# Altium PCB 示波器AD板最终实物版图.PcbDoc (part 1 of 2)
Units mil, origin at the board's own origin, x right, y up, seen from the top; angles counter-clockwise.
Board outline 10285 x 5540 mil, 2 copper layers (Top Layer, Bottom Layer); 84 components, 55 nets, 271 pads, 0 vias.
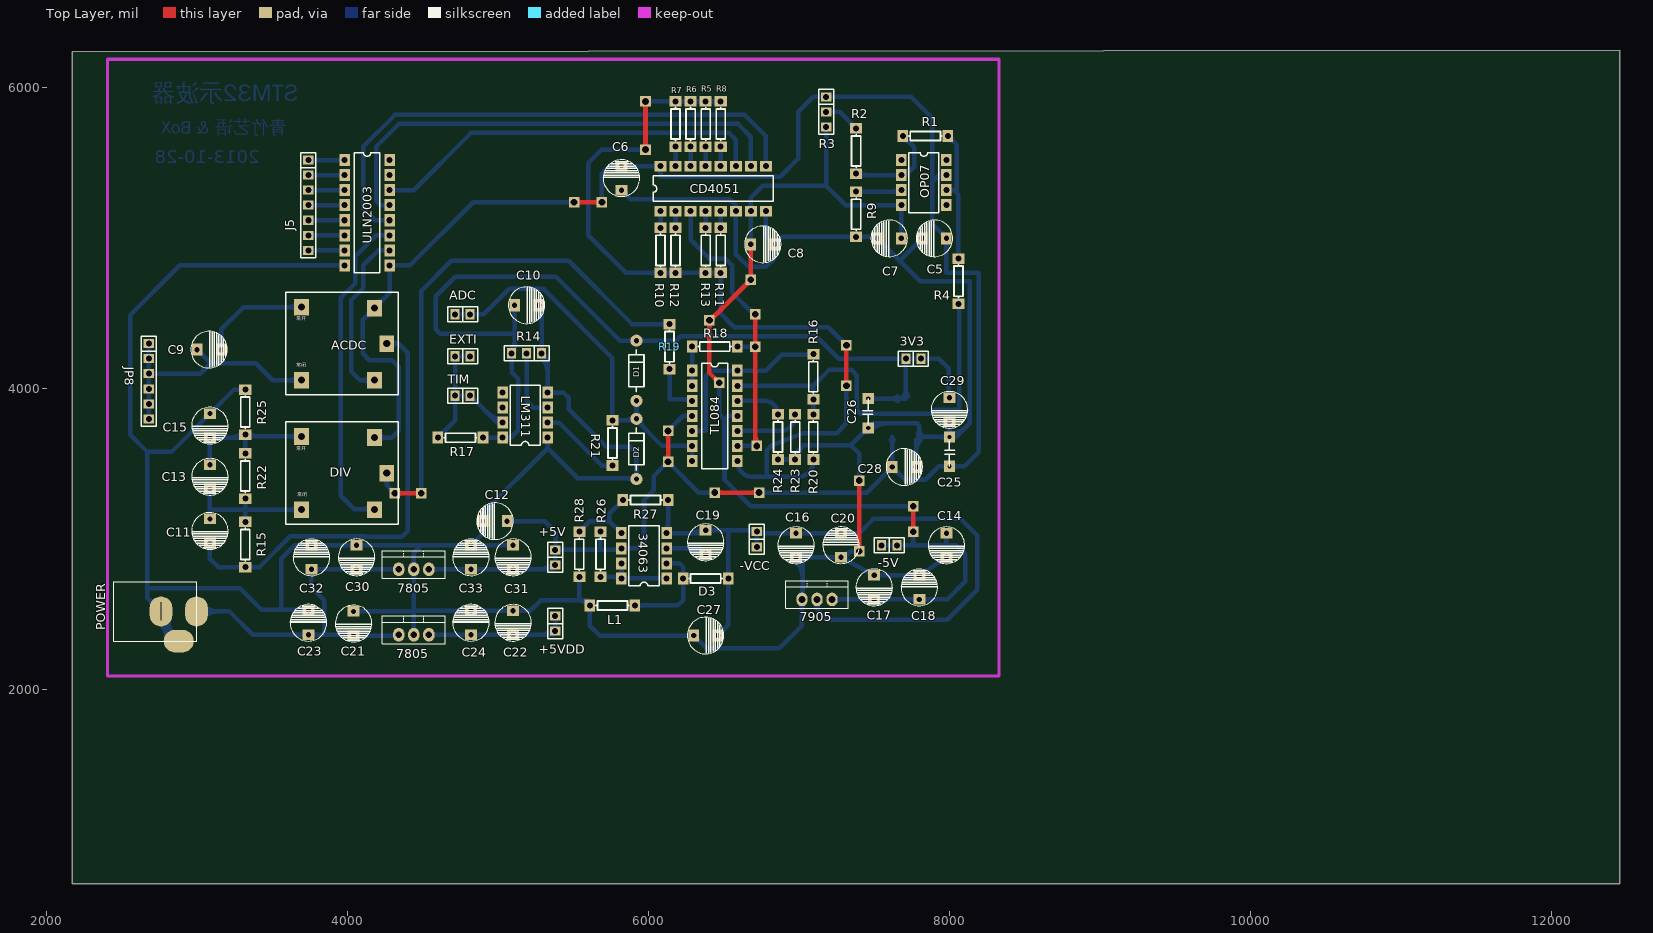
[diagram p0: Top Layer view]
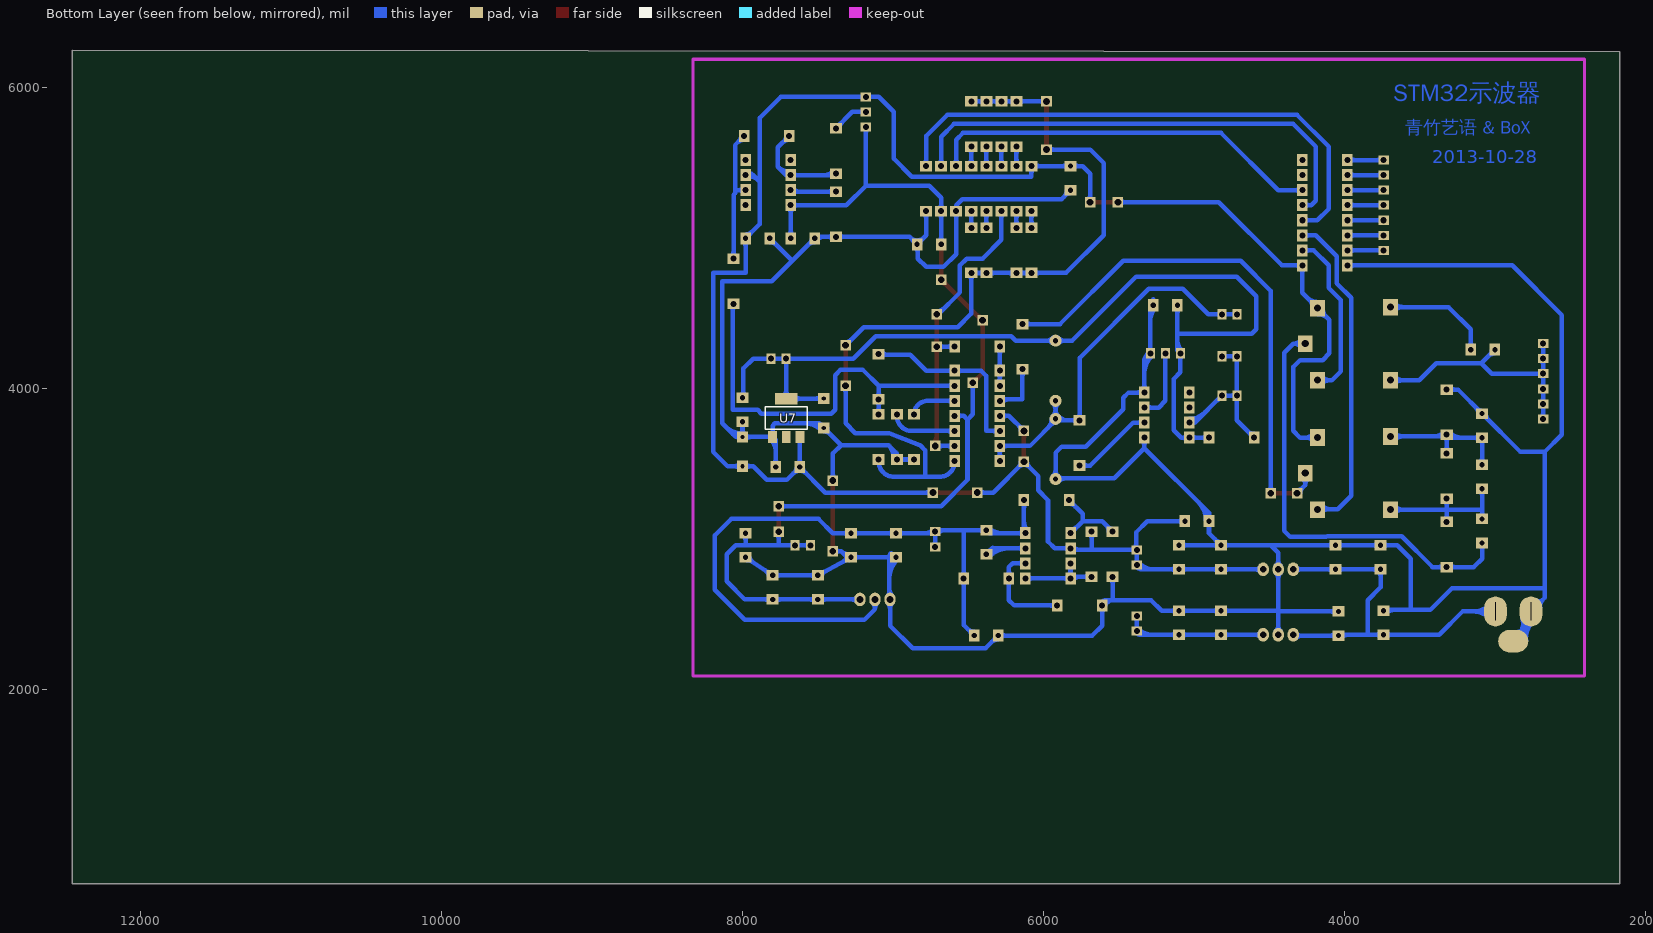
[diagram p1: Bottom Layer view, seen from below]

## Layer stack, top to bottom
Top Layer: signal copper 1.4
Dielectric: dielectric 12.6, FR-4, Dk 4.8
Bottom Layer: signal copper 1.4

## Board outline
2170,6240 2170,710 12455,710 12455,6250

## Design rules (kind name [scope] priority, off if disabled: settings)
Clearance [All] p1: gap=10
PolygonConnect [All] p1: connectstyle=Relief reliefconductorwidth=10 reliefentries=4 polygonreliefangle="90 Angle"
RoutingVias [All] p1: holewidth=28 width=50 viastyle="Through Hole" minholewidth=28 minwidth=50 maxholewidth=28 maxwidth=50
SilkscreenOverComponentPads [All] p1: minsilkscreentomaskgap=10
SolderMaskExpansion [All] p1: expansion=4
TestPointUsage [All] p1: valid=0 allowmultiple=FALSE
Testpoint [All] p1: side=15 testpointundercomponent=TRUE minsize=40 maxsize=100 preferedsize=60 minholesize=0 maxholesize=40 preferedholesize=32 testpointgrid=1 style=1023 order=0123456789
Width [All] p1: maxlimit=30 minlimit=10 preferedwidth=10 toplayer_minwidth=30 toplayer_prefwidth=30 bottomlayer_minwidth=30 bottomlayer_prefwidth=30 minimp=50.000000 maximp=50.000000 favimp=50.000000
23 further rules are at their usual default settings.

## Components (designator, comment, footprint, x,y, rotation, side; value= is the part's Value field where it differs from the comment)
3V3 "3V3" SIP2 7760,4200 r0 top (schematic designator JP11)
7805 "LM7805CT" TO-220 4440,2800 r0 top (schematic designator LM2)
7805 "LM7805CT" TO-220 4440,2365 r0 top (schematic designator LM1)
7905 "LM7905" TO-220 7120,2600 r0 top (schematic designator TM1)
34063 "MC34063" DIP08 6120,2740 r180 top (schematic designator U6)
+5V "+5V" SIP2 5380,2880 r270 top (schematic designator JP13)
+5VDD "+5VDD" SIP2 5380,2440 r90 top (schematic designator JP10)
-5V "-5V" SIP2 7600,2960 r0 top (schematic designator JP9)
-VCC "-VCC" SIP2 6720,3000 r90 top (schematic designator JP12)
ACDC "Comment" "JDQ  1" 4260,4300 r270 top
ADC "ADC1" SIP2 4765,4495 r0 top (schematic designator J8)
C5 "Cap" CD6 7980,5000 r0 top
C6 "Cap" CD6 5820,5320 r270 top
C7 "Cap" CD6 7680,5000 r0 top
C8 "Cap" CD6 6680,4960 r180 top
C9 "Cap" CD6 3000,4260 r180 top
C10 "Cap" CD6 5110,4555 r180 top
C11 "Cap" CD6 3085,3135 r90 top
C12 "Cap" CD6 5060,3120 r0 top
C13 "Cap" CD6 3085,3495 r90 top
C14 "Cap" CD6 7980,3040 r90 top
C15 "Cap" CD6 3085,3835 r90 top
C16 "Cap" CD6 6980,3040 r90 top
C17 "Cap Pol1" CD6 7500,2760 r90 top
C18 "Cap" CD6 7800,2600 r270 top
C19 "Cap" CD6 6380,3060 r90 top
C20 "Cap Pol1" CD6 7280,2880 r270 top
C21 "Cap" CD6 4040,2520 r90 top
C22 "Cap" CD6 5100,2525 r90 top
C23 "Cap Pol1" CD6 3740,2365 r270 top
C24 "Cap Pol1" CD6 4820,2365 r270 top
C25 "Cap" CB2 8000,3680 r270 top
C26 "Cap" CB2 7460,3740 r90 top
C27 "Cap Pol1" CD6 6300,2360 r180 top
C28 "Cap Pol1" CD6 7620,3480 r180 top
C29 "Cap Pol1" CD6 8000,3940 r90 top
C30 "Cap" CD6 4060,2960 r90 top
C31 "Cap" CD6 5100,2960 r90 top
C32 "Cap Pol1" CD6 3760,2800 r270 top
C33 "Cap Pol1" CD6 4820,2800 r270 top
CD4051 "CD4051" DIP16 6080,5180 r90 top (schematic designator U3)
D1 "1N4001" Diode0.4 5920,4120 r90 top
D2 "1N4001" Diode0.4 5920,3600 r90 top
D3 "1N5819" AXIAL0.3 6380,2740 r180 top
DIV "Comment" "JDQ  1" 4260,3440 r270 top
EXTI "EXTI" SIP2 4765,4215 r0 top (schematic designator J7)
J5 "STMCTR" SIP7 3740,5520 r270 top
JP8 "SIG_IN" SIP6 2680,4300 r270 top
L1 "100uH" AXIAL0.3 5760,2560 r0 top
LM311 "LM311" DIP08 5330,3675 r180 top (schematic designator U5)
OP07 "OP07" DIP08 7680,5520 r0 top (schematic designator U4)
POWER "Comment" CHAZUO 2760,2520 r90 top
R1 "Res2" AXIAL0.3 7840,5680 r180 top
R2 "Res2" AXIAL0.3 7380,5580 r90 top
R3 "POT2" SIP3 7180,5840 r270 top
R4 "Res2" AXIAL0.3 8060,4715 r90 top
R5 "Res2" AXIAL0.3 6380,5760 r90 top
R6 "Res2" AXIAL0.3 6280,5760 r90 top
R7 "Res2" AXIAL0.3 6180,5760 r90 top
R8 "Res2" AXIAL0.3 6480,5760 r90 top
R9 "Res2" AXIAL0.3 7380,5160 r90 top
R10 "Res2" AXIAL0.3 6080,4920 r270 top
R11 "Res2" AXIAL0.3 6480,4920 r270 top
R12 "Res2" AXIAL0.3 6180,4920 r270 top
R13 "Res2" AXIAL0.3 6380,4920 r270 top
R14 "POT2" SIP3 5190,4235 r180 top
R15 "Res2" AXIAL0.3 3320,2965 r90 top
R16 "Res2" AXIAL0.3 7095,4080 r270 top
R17 "Res2" AXIAL0.3 4750,3675 r180 top
R18 "Res2" AXIAL0.3 6440,4280 r0 top
R19 "Res2" AXIAL0.3 6140,4280 r270 top
R20 "Res2" AXIAL0.3 7095,3680 r270 top
R21 "Res2" AXIAL0.3 5760,3640 r90 top
R22 "Res2" AXIAL0.3 3320,3420 r90 top
R23 "Res2" AXIAL0.3 6975,3680 r90 top
R24 "Res2" AXIAL0.3 6860,3680 r90 top
R25 "Res2" AXIAL0.3 3320,3845 r90 top
R26 "Res2" AXIAL0.3 5680,2900 r90 top
R27 "Res2" AXIAL0.3 5980,3260 r180 top
R28 "Res2" AXIAL0.3 5540,2900 r270 top
TIM "TIM1" SIP2 4765,3955 r0 top (schematic designator J6)
TL084 "TL084" DIP14 6290,4120 r0 top (schematic designator U1)
U7 "AMS1117" SOT223 7800,3680 r180 bottom
ULN2003 "ULN2003" DIP16 3980,5520 r0 top (schematic designator U2)

## Footprints (in the part's own frame and the unit in brackets; to place one, negate y for a bottom-side part, rotate by r counter-clockwise, add the part's x,y. Pads: shape width x height; smd on the part's side, far side on the other; paste and mask are expansions set on the pad)
AXIAL0.3 [mil]
  rect 70x80 hole 40: 1(-150,0) 2(150,0)
  silkscreen extent -109,-30 109,30
CB2 [mm]
  rect 1.905x1.905 hole 0.7: 1(0,0) 2(4.953,0)
  silkscreen extent 0.64,-0.76 4.95,0.89
CD6 [mil]
  rect 70x80 hole 35: 1(0,0) 2(-160,0)
  silkscreen extent -202,-122 42,122
CHAZUO [mil]
  oval 200x150 hole 1 slot 120 at 0 deg: 1(-0.02,-236) 3(-0.02,-0.01)
  oval 150x200 hole 1 slot 120 at 90 deg: 2(-197.03,-118.01)
  silkscreen extent -197,-236 197,315
Diode0.4 [mil]
  round 80 hole 35: 1(-200,0) 2(200,0)
  silkscreen extent -140,-50 140,50
DIP08 [mil]
  rect 70x80 hole 40: 1(0,0) 2(0,-100) 3(0,-200) 4(0,-300) 5(300,-300) 6(300,-200) 7(300,-100) 8(300,0)
  silkscreen extent 50,-350 250,50
DIP14 [mil]
  rect 70x80 hole 40: 1(0,0) 2(0,-100) 3(0,-200) 4(0,-300) 5(0,-400) 6(0,-500) 7(0,-600) 8(300,-600) 9(300,-500) 10(300,-400) 11(300,-300) 12(300,-200) 13(300,-100) 14(300,0)
  silkscreen extent 65,-650 235,50
DIP16 [mil]
  rect 70x80 hole 40: 1(0,0) 2(0,-100) 3(0,-200) 4(0,-300) 5(0,-400) 6(0,-500) 7(0,-600) 8(0,-700) 9(300,-700) 10(300,-600) 11(300,-500) 12(300,-400) 13(300,-300) 14(300,-200) 15(300,-100) 16(300,0)
  silkscreen extent 65,-750 235,50
"JDQ  1" [mm]
  rect 2.794x2.5 hole 1.2: 1(0,0) 2(-6.17,-14.38) 3(6.17,-14.38) 4(-6,-2.07) 5(6.17,-2.07)
  silkscreen extent -8.67,-17.07 8.67,1.93
SIP2 [mil]
  rect 60x70 hole 40: 1(-50,0) 2(50,0)
  silkscreen extent -100,-50 100,50
SIP3 [mil]
  rect 60x70 hole 40: 1(-100,0) 2(0,0) 3(100,0)
  silkscreen extent -150,-50 150,50
SIP6 [mil]
  rect 60x70 hole 40: 1(0,0) 2(100,0) 3(200,0) 4(300,0) 5(400,0) 6(500,0)
  silkscreen extent -50,-50 550,50
SIP7 [mil]
  rect 60x70 hole 40: 1(0,0) 2(100,0) 3(200,0) 4(300,0) 5(400,0) 6(500,0) 7(600,0)
  silkscreen extent -50,-50 650,50
SOT223 [mil]
  rect 59x79 smd: 1(0,0) 2(90.55,0) 3(181.1,0)
  rect 150x79 smd: 4(89.88,253.54)
  silkscreen extent -49,52 231,202
TO-220 [mil]
  oval 75x90 hole 45: 1(-100,0) 2(0,0) 3(100,0)
  silkscreen extent -208,-58 208,125

## Part data
3V3 +5V -5V -VCC: library part "HEADER 2"
+5VDD: library part "HEADER 3"
ADC EXTI TIM: library part CON2, "Connector"
C5 C6 C7 C8 C9 C10 C11 C12 C13 C14 C15 C16 C18 C19 C21 C22 C25 C26 C30 C31: "Capacitor"
C17 C20 C23 C24 C27 C28 C29 C32 C33: "Polarized Capacitor (Radial)"
D1 D2: library part DIODE, "Diode"
D3: library part "DIODE SCHOTTKY", "Schottky Diode"
J5: library part CON7, "Connector"
JP8: library part "HEADER 6"
L1: library part "INDUCTOR IRON"
R1 R2 R4 R5 R6 R7 R8 R9 R10 R11 R12 R13 R15 R16 R17 R18 R19 R20 R21 R22 R23 R24 R25 R26 R27 R28: "Resistor"
R3 R14: "Potentiometer"
TL084: library part "TL084 ID"

## Free pads (board coordinates)
  rect 70x70 hole 45: 0(4315,3305) 0(6130,3720) 1(4490,3305) 1(6130,3515) 2(6735,3310) 3(6440,3310) 3(7760,3050) 4(6470,4040) 4(7760,3220) 5(6680,4725) 5(6720,3620) 6(6405,4455) 6(6710,4280) 7(6710,4495) 7(7400,3390) 8(5980,5910) 8(7400,2920) 9(5980,5590) 10(7315,4290) 11(7315,4020) 12(5505,5240) 13(5690,5240)

## Nets (pads, with @x,y where several pads share a name; then routed paths per layer and width w, separated by ;. In a path a pad name is that pad's centre, name@x,y a point inside that pad or via, vN(x,y) a via of type N, cw(c..) or ccw(c..) an arc to the next point about the centre after c; other vN are vias at no path point)
3V3: 3V3.1 3V3.2 C10.1 C26.2 C29.1 D1.2 LM311.8 R14.3 R17.1 U7.4 | length 7588.9
  Bottom Layer w30: R17.1@4900,3675 LM311.8@5030,3675 5085,3675 5135,3725 5135,4065 5090,4110 R14.3@5090,4235 5110,4255 5110,4365 ; R17.1@4914.14,3660.86 cw(c4948.28,3626.72) 4948.28,3675 cw(c4948.28,3723.28) R17.1@4914.14,3689.14 ; LM311.8@5015.86,3660.86 ccw(c4981.72,3626.72) 4981.72,3675 ccw(c4981.72,3723.28) LM311.8@5015.86,3689.14 ; LM311.8@5044.14,3660.86 cw(c5078.28,3626.72) 5078.28,3675 cw(c5078.28,3723.28) LM311.8@5044.14,3689.14 ; R14.3@5079.39,4219.39 cw(c5053.79,4193.79) 5090,4193.79 cw(c5126.21,4193.79) R14.3@5100.61,4219.39 ; R14.3@5079.39,4250.61 ccw(c5005.5,4324.5) 5110,4324.5 ; C10.1@5095.86,4535.86 cw(c5061.72,4501.72) 5110,4501.72 cw(c5158.28,4501.72) C10.1@5124.14,4535.86 ; C10.1@5110,4555 5110,4365 ; D1.2@5902.32,4302.32 ccw(c5859.64,4259.64) 5859.64,4320 ccw(c5859.64,4380.36) D1.2@5902.32,4337.68 ; D1.2@5937.68,4302.32 cw(c5980.36,4259.64) 5980.36,4320 cw(c5980.36,4380.36) D1.2@5937.68,4337.68 ; C26.2@7460,3935 7708.66,3935 U7.4@7710,3933.66 ; C26.2@7475.91,3919.09 cw(c7514.32,3880.68) 7514.32,3935 cw(c7514.32,3989.32) C26.2@7475.91,3950.91 ; 7611.95,3935 cw(c7611.95,3870.88) U7.4@7657.29,3916.22 ; 7618.98,3935 ccw(c7618.98,3989.18) U7.4@7657.29,3950.87 ; U7.4@7692.79,3950.87 ccw(c7651.25,3992.41) 7710,3992.41 ; 3V3.1@7699.39,4184.39 cw(c7673.79,4158.79) 7710,4158.79 cw(c7746.21,4158.79) 3V3.1@7720.61,4184.39 ; 3V3.1@7699.39,4189.39 ccw(c7673.79,4163.79) 7673.79,4200 ccw(c7673.79,4236.21) 3V3.1@7699.39,4210.61 ; 7710,3992.98 ccw(c7769.55,3992.98) U7.4@7727.44,3950.87 ; U7.4@7710.12,3933.54 U7.4@7710,3933.66 ; 3V3.1@7720.61,4189.39 cw(c7746.21,4163.79) 7746.21,4200 cw(c7746.21,4236.21) 3V3.1@7720.61,4210.61 ; 3V3.2@7799.39,4189.39 ccw(c7773.79,4163.79) 7773.79,4200 ccw(c7773.79,4236.21) 3V3.2@7799.39,4210.61 ; 3V3.2@7820.61,4189.39 cw(c7846.21,4163.79) 7846.21,4200 cw(c7846.21,4236.21) 3V3.2@7820.61,4210.61 ; C29.1@7980.86,3954.14 ccw(c7946.72,3988.28) 7995,3988.28 ccw(c8043.28,3988.28) C29.1@8009.14,3954.14 ; C29.1@8000,3940 7995,3945 7995,4135 7930,4200 3V3.2@7810,4200 3V3.1@7710,4200 ; 5110,4365 4615,4365 4585,4395 4585,4615 4715,4745 5385,4745 5810,4320 6185,4320 6215,4350 7115,4350 7265,4200 3V3.1@7710,4200 ; U7.4@7710,3933.66 3V3.1@7710,4200
4051A: CD4051.11 ULN2003.14 | length 2802.7
  Bottom Layer w30: ULN2003.14@4280,5320 4440,5320 4820,5700 6535,5700 6580,5655 CD4051.11@6580,5480 ; ULN2003.14@4294.14,5305.86 cw(c4328.28,5271.72) 4328.28,5320 cw(c4328.28,5368.28) ULN2003.14@4294.14,5334.14 ; CD4051.11@6565.86,5494.14 ccw(c6531.72,5528.28) 6580,5528.28 ccw(c6628.28,5528.28) CD4051.11@6594.14,5494.14
4051B: CD4051.10 ULN2003.13 | length 3396.5
  Bottom Layer w30: ULN2003.13@4265.86,5205.86 ccw(c4231.72,5171.72) 4231.72,5220 ccw(c4231.72,5268.28) ULN2003.13@4265.86,5234.14 ; ULN2003.13@4280,5220 4220,5220 4190,5250 4190,5610 4340,5760 6595,5760 6680,5675 CD4051.10@6680,5480 ; CD4051.10@6665.86,5494.14 ccw(c6631.72,5528.28) 6680,5528.28 ccw(c6728.28,5528.28) CD4051.10@6694.14,5494.14
4051C: CD4051.9 ULN2003.12 | length 3792.7
  Bottom Layer w30: ULN2003.12@4265.86,5105.86 ccw(c4231.72,5071.72) 4231.72,5120 ccw(c4231.72,5168.28) ULN2003.12@4265.86,5134.14 ; ULN2003.12@4280,5120 4180,5120 4105,5195 4105,5610 4315,5820 6640,5820 6780,5680 CD4051.9@6780,5480 ; CD4051.9@6765.86,5494.14 ccw(c6731.72,5528.28) 6780,5528.28 ccw(c6828.28,5528.28) CD4051.9@6794.14,5494.14
+5V: 7805.3@4540,2800 34063.6 +5V.1 +5V.2 ACDC.4 C5.1 C6.2 C12.1 C25.2 C28.1 C31.2 C33.1 CD4051.16 DIV.4 OP07.7 pad.0@6130,3720 pad.1@6130,3515 pad.2 pad.3@6440,3310 pad.12 pad.13 R3.1 R26.2 TL084.4 U7.3 ULN2003.9 | length 18334.1
  Top Layer w30: pad.12@5505,5240 pad.13@5690,5240 ; pad.12@5519.14,5225.86 cw(c5553.28,5191.72) 5553.28,5240 cw(c5553.28,5288.28) pad.12@5519.14,5254.14 ; pad.13@5675.86,5225.86 ccw(c5641.72,5191.72) 5641.72,5240 ccw(c5641.72,5288.28) pad.13@5675.86,5254.14 ; pad.1@6115.86,3529.14 ccw(c6081.72,3563.28) 6130,3563.28 ccw(c6178.28,3563.28) pad.1@6144.14,3529.14 ; pad.0@6115.86,3705.86 cw(c6081.72,3671.72) 6130,3671.72 cw(c6178.28,3671.72) pad.0@6144.14,3705.86 ; pad.1@6130,3515 pad.0@6130,3720 ; pad.3@6440,3310 pad.2@6735,3310 ; pad.3@6454.14,3295.86 cw(c6488.28,3261.72) 6488.28,3310 cw(c6488.28,3358.28) pad.3@6454.14,3324.14 ; pad.2@6720.86,3295.86 ccw(c6686.72,3261.72) 6686.72,3310 ccw(c6686.72,3358.28) pad.2@6720.86,3324.14
  Bottom Layer w30: 4110.22,4467.94 cw(c4178.5,4399.65) ACDC.4@4178.5,4496.22 ; 4124.19,4481.91 ccw(c4075.67,4530.43) ACDC.4@4144.29,4530.43 ; DIV.4@4178.5,3676.22 4179.72,3675 4295,3675 4340,3720 4340,4145 4295,4190 4145,4190 4100,4235 4100,4457.72 ACDC.4@4178.5,4536.22 4280,4637.72 ULN2003.9@4280,4820 4415,4820 4835,5240 pad.12@5505,5240 ; ACDC.4@4178.5,4576.22 ccw(c4178.5,4672.79) 4246.79,4604.5 ; DIV.4@4202.7,3652.03 cw(c4258.15,3596.57) 4258.15,3675 ; DIV.4@4202.7,3700.41 ccw(c4264.05,3761.76) 4264.05,3675 ; ACDC.4@4212.72,4542.01 cw(c4281.34,4542.01) 4232.82,4590.53 ; ULN2003.9@4265.86,4800.86 cw(c4231.72,4766.72) 4280,4766.72 cw(c4328.28,4766.72) ULN2003.9@4294.14,4800.86 ; ULN2003.9@4294.14,4805.86 cw(c4328.28,4771.72) 4328.28,4820 cw(c4328.28,4868.28) ULN2003.9@4294.14,4834.14 ; 7805.3@4540,2800 C33.1@4820,2800 C31.2@5100,2800 5350,2800 +5V.2@5380,2830 +5V.1@5380,2930 ; 7805.3@4555.91,2784.09 cw(c4594.32,2745.68) 4594.32,2800 cw(c4594.32,2854.32) 7805.3@4555.91,2815.91 ; C33.1@4800.86,2785.86 ccw(c4766.72,2751.72) 4766.72,2800 ccw(c4766.72,2848.28) C33.1@4800.86,2814.14 ; C33.1@4839.14,2785.86 cw(c4873.28,2751.72) 4873.28,2800 cw(c4873.28,2848.28) C33.1@4839.14,2814.14 ; C12.1@5060,3120 5310,3120 5385,3045 5385,2935 +5V.1@5380,2930 ; C12.1@5074.14,3105.86 cw(c5108.28,3071.72) 5108.28,3120 cw(c5108.28,3168.28) C12.1@5074.14,3134.14 ; C31.2@5080.86,2785.86 ccw(c5046.72,2751.72) 5046.72,2800 ccw(c5046.72,2848.28) C31.2@5080.86,2814.14 ; C31.2@5119.14,2785.86 cw(c5153.28,2751.72) 5153.28,2800 cw(c5153.28,2848.28) C31.2@5119.14,2814.14 ; 5266.36,2800 ccw(c5266.36,2938.64) +5V.2@5364.39,2840.61 ; 5338.79,2800 ccw(c5338.79,2866.21) +5V.2@5385.61,2819.39 ; +5V.2@5369.39,2840.61 ccw(c5343.79,2866.21) 5380,2866.21 ccw(c5416.21,2866.21) +5V.2@5390.61,2840.61 ; +5V.1@5369.39,2919.39 cw(c5343.79,2893.79) 5380,2893.79 cw(c5416.21,2893.79) +5V.1@5390.61,2919.39 ; +5V.1@5374.39,2940.61 ccw(c5348.79,2966.21) 5385,2966.21 ccw(c5421.21,2966.21) 5395.61,2940.61 ccw(c5421.21,2966.21) 5421.21,2930 ccw(c5421.21,2893.79) +5V.1@5395.61,2919.39 ; pad.12@5490.86,5225.86 ccw(c5456.72,5191.72) 5456.72,5240 ccw(c5456.72,5288.28) pad.12@5490.86,5254.14 ; R26.2@5665.86,3035.86 cw(c5631.72,3001.72) 5680,3001.72 cw(c5728.28,3001.72) R26.2@5694.14,3035.86 ; pad.13@5675.86,5254.14 ccw(c5641.72,5288.28) 5690,5288.28 ccw(c5738.28,5288.28) pad.13@5704.14,5254.14 ; R26.2@5680,3050 5680,2930 ; pad.13@5690,5240 5690,5430 5740,5480 C6.2@5820,5480 CD4051.16@6080,5480 6080,5410 6875,5410 6995,5530 6995,5840 7095,5940 R3.1@7180,5940 7745,5940 7885,5800 7885,5375 ; 5759.64,2930 ccw(c5759.64,2995.36) 34063.6@5805.86,2949.14 ; 5783.79,2930 cw(c5783.79,2898.79) 34063.6@5805.86,2920.86 ; C6.2@5800.86,5465.86 ccw(c5766.72,5431.72) 5766.72,5480 ccw(c5766.72,5528.28) C6.2@5800.86,5494.14 ; 34063.6@5834.14,2925.86 cw(c5868.28,2891.72) 5868.28,2940 cw(c5868.28,2988.28) 34063.6@5834.14,2954.14 ; C6.2@5839.14,5465.86 cw(c5873.28,5431.72) 5873.28,5480 cw(c5873.28,5528.28) C6.2@5839.14,5494.14 ; CD4051.16@6060.86,5465.86 ccw(c6026.72,5431.72) 6026.72,5480 ccw(c6026.72,5528.28) CD4051.16@6060.86,5494.14 ; CD4051.16@6065.86,5465.86 cw(c6031.72,5431.72) 6080,5431.72 cw(c6128.28,5431.72) CD4051.16@6094.14,5465.86 ; pad.1@6110,3515 cw(c6061.72,3515) 6095.86,3480.86 cw(c6130,3446.72) 6130,3495 cw(c6130,3446.72) 6164.14,3480.86 cw(c6198.28,3515) pad.1@6150,3515 ; pad.0@6130,3720 6230,3820 TL084.4@6290,3820 ; pad.0@6130,3740 ccw(c6130,3788.28) 6164.14,3754.14 ccw(c6198.28,3720) pad.0@6150,3720 ; TL084.4@6275.86,3805.86 ccw(c6241.72,3771.72) 6241.72,3820 ccw(c6241.72,3868.28) TL084.4@6275.86,3834.14 ; pad.3@6425.86,3295.86 ccw(c6391.72,3261.72) 6391.72,3310 ccw(c6391.72,3358.28) pad.3@6425.86,3324.14 ; pad.3@6440,3310 6335,3310 pad.1@6130,3515 6035,3420 6035,3325 5970,3260 5970,2985 5925,2940 34063.6@5820,2940 5810,2930 5680,2930 ; pad.2@6735,3310 7450,3310 C28.1@7620,3480 ; pad.2@6749.14,3295.86 cw(c6783.28,3261.72) 6783.28,3310 cw(c6783.28,3358.28) pad.2@6749.14,3324.14 ; R3.1@7164.39,5929.39 ccw(c7138.79,5903.79) 7138.79,5940 ccw(c7138.79,5976.21) R3.1@7164.39,5950.61 ; R3.1@7195.61,5929.39 cw(c7221.21,5903.79) 7221.21,5940 cw(c7221.21,5976.21) R3.1@7195.61,5950.61 ; 7577.32,3437.32 cw(c7620,3394.64) 7620,3455 cw(c7620,3394.64) 7662.68,3437.32 ; C28.1@7589.39,3449.39 ccw(c7563.79,3475) C28.1@7600,3475 ; C28.1@7605.86,3499.14 ccw(c7574.38,3530.62) 7618.9,3530.62 ; U7.3@7608.64,3659.75 cw(c7583.89,3634.99) 7618.9,3634.99 cw(c7653.9,3634.99) U7.3@7629.15,3659.75 ; 7618.9,3535.94 ccw(c7670.94,3535.94) C28.1@7634.14,3499.14 ; U7.3@7618.9,3680 7618.9,3481.1 C28.1@7620,3480 ; C28.1@7640,3475 ccw(c7676.21,3475) C28.1@7650.61,3449.39 ; 7905,5395 cw(c7942.36,5357.64) OP07.7@7969.67,5402.88 ; 7905.9,5395.9 cw(c7976.34,5325.46) OP07.7@7980.41,5424.99 ; 7932.1,5422.1 cw(c7962.76,5391.44) OP07.7@7985.17,5428.56 ; 7937.32,5042.68 ccw(c7980,5085.36) C5.1@7980,5025 ; C5.1@7949.39,5030.61 cw(c7923.79,5005) C5.1@7960,5005 ; C5.1@7965.86,4980.86 cw(c7931.72,4946.72) 7980,4946.72 cw(c8028.28,4946.72) C5.1@7994.14,4980.86 ; OP07.7@7965.86,5405.86 ccw(c7931.72,5371.72) 7931.72,5420 ccw(c7931.72,5468.28) OP07.7@7965.86,5434.14 ; OP07.7@7980,5420 7930,5420 7885,5375 ; C25.2@7984.09,3469.09 ccw(c7945.68,3430.68) 7945.68,3485 ccw(c7945.68,3539.32) C25.2@7984.09,3500.91 ; C25.2@8015.91,3469.09 cw(c8054.32,3430.68) 8054.32,3485 cw(c8054.32,3539.32) C25.2@8015.91,3500.91 ; +5V.1@5380,2930 5680,2930 ; C28.1@7620,3480 7705,3395 7840,3395 7930,3485 C25.2@8000,3485 8100,3485 8195,3580 8195,4770 7980,4770 C5.1@7980,5000 7885,5095 7885,5375
+5VDD: 7805.3@4540,2365 +5VDD.1 +5VDD.2 C22.2 C24.1 | length 1586.9
  Bottom Layer w30: 7805.3@4540,2365 C24.1@4820,2365 C22.2@5100,2365 5355,2365 +5VDD.1@5380,2390 +5VDD.2@5380,2490 ; 7805.3@4555.91,2349.09 cw(c4594.32,2310.68) 4594.32,2365 cw(c4594.32,2419.32) 7805.3@4555.91,2380.91 ; C24.1@4800.86,2350.86 ccw(c4766.72,2316.72) 4766.72,2365 ccw(c4766.72,2413.28) C24.1@4800.86,2379.14 ; C24.1@4839.14,2350.86 cw(c4873.28,2316.72) 4873.28,2365 cw(c4873.28,2413.28) C24.1@4839.14,2379.14 ; C22.2@5080.86,2350.86 ccw(c5046.72,2316.72) 5046.72,2365 ccw(c5046.72,2413.28) C22.2@5080.86,2379.14 ; C22.2@5119.14,2350.86 cw(c5153.28,2316.72) 5153.28,2365 cw(c5153.28,2413.28) C22.2@5119.14,2379.14 ; 5278.43,2365 ccw(c5278.43,2486.57) +5VDD.1@5364.39,2400.61 ; +5VDD.1@5350.86,2365 ccw(c5350.86,2414.14) +5VDD.1@5385.61,2379.39 ; +5VDD.1@5369.39,2400.61 ccw(c5343.79,2426.21) 5380,2426.21 ccw(c5416.21,2426.21) +5VDD.1@5390.61,2400.61 ; +5VDD.2@5369.39,2479.39 cw(c5343.79,2453.79) 5380,2453.79 cw(c5416.21,2453.79) +5VDD.2@5390.61,2479.39
+12V: 7805.1 C21.2 C23.1 C30.2 C32.1 POWER.1 | length 3488.7
  Bottom Layer w30: POWER.1@2996,2519.98 3215.02,2519.98 3370,2365 C23.1@3740,2365 ; POWER.1@3038.43,2477.55 cw(c3140.85,2375.13) 3140.85,2519.98 cw(c3140.85,2664.83) POWER.1@3038.43,2562.41 ; C23.1@3720.86,2350.86 ccw(c3686.72,2316.72) 3686.72,2365 ccw(c3686.72,2413.28) C23.1@3720.86,2379.14 ; C23.1@3725,2380 C23.1@3740,2365 ; C32.1@3745.86,2785.86 cw(c3711.72,2751.72) 3760,2751.72 cw(c3808.28,2751.72) C32.1@3774.14,2785.86 ; C23.1@3759.14,2350.86 cw(c3793.28,2316.72) 3793.28,2365 cw(c3793.28,2413.28) C23.1@3759.14,2379.14 ; C32.1@3779.14,2785.86 cw(c3813.28,2751.72) 3813.28,2800 cw(c3813.28,2848.28) C32.1@3779.14,2814.14 ; 3974.64,2365 cw(c3974.64,2299.64) C21.2@4020.86,2345.86 ; 3998.79,2365 ccw(c3998.79,2396.21) C21.2@4020.86,2374.14 ; C30.2@4040.86,2785.86 ccw(c4006.72,2751.72) 4006.72,2800 ccw(c4006.72,2848.28) C30.2@4040.86,2814.14 ; C21.2@4059.14,2345.86 cw(c4093.28,2311.72) 4093.28,2360 cw(c4093.28,2408.28) C21.2@4059.14,2374.14 ; C30.2@4079.14,2785.86 cw(c4113.28,2751.72) 4113.28,2800 cw(c4113.28,2848.28) C30.2@4079.14,2814.14 ; 4279.64,2360 cw(c4279.64,2297.14) 7805.1@4324.09,2341.59 ; 4291.72,2360 ccw(c4291.72,2405.78) 7805.1@4324.09,2373.41 ; 7805.1@4324.09,2784.09 ccw(c4285.68,2745.68) 4285.68,2800 ccw(c4285.68,2854.32) 7805.1@4324.09,2815.91 ; 7805.1@4340,2365 4335,2360 C21.2@4040,2360 4035,2365 3845,2365 ; 7805.1@4340,2800 C30.2@4060,2800 C32.1@3760,2800 3760,2680 3845,2595 3845,2365 ; C23.1@3740,2365 3845,2365
-5V: 7905.3 -5V.1 -5V.2 C7.1 C8.1 C14.1 C17.2 C18.1 CD4051.7 OP07.4 pad.3@7760,3050 pad.4 pad.5@6680,4725 pad.6@6405,4455 R3.3 TL084.11 | length 9244.9
  Top Layer w30: pad.6@6390.86,4440.86 cw(c6356.72,4406.72) 6405,4406.72 cw(c6453.28,4406.72) pad.6@6419.14,4440.86 ; pad.6@6405,4475 ccw(c6405,4535.36) 6447.68,4492.68 ; pad.6@6425,4455 cw(c6461.21,4455) pad.6@6435.61,4480.61 ; pad.4@6450,4040 ccw(c6401.72,4040) 6435.86,4074.14 ccw(c6470,4108.28) pad.4@6470,4060 ; pad.4@6470,4040 6405,4105 pad.6@6405,4455 6410,4455 pad.5@6680,4725 C8.1@6680,4960 ; pad.5@6660,4725 cw(c6611.72,4725) 6645.86,4690.86 cw(c6680,4656.72) pad.5@6680,4705 ; pad.5@6665.86,4739.14 ccw(c6631.72,4773.28) 6680,4773.28 ccw(c6728.28,4773.28) pad.5@6694.14,4739.14 ; C8.1@6665.86,4940.86 cw(c6631.72,4906.72) 6680,4906.72 cw(c6728.28,4906.72) C8.1@6694.14,4940.86 ; pad.3@7745.86,3064.14 ccw(c7711.72,3098.28) 7760,3098.28 ccw(c7808.28,3098.28) pad.3@7774.14,3064.14 ; pad.4@7745.86,3205.86 cw(c7711.72,3171.72) 7760,3171.72 cw(c7808.28,3171.72) pad.4@7774.14,3205.86 ; pad.3@7760,3050 pad.4@7760,3220
  Bottom Layer w30: pad.4@6455.86,4025.86 cw(c6421.72,3991.72) 6470,3991.72 cw(c6518.28,3991.72) pad.4@6484.14,4025.86 ; pad.4@6470,4040 6470,3830 6505,3795 ; TL084.11@6575.86,3805.86 ccw(c6541.72,3771.72) 6541.72,3820 ccw(c6541.72,3868.28) TL084.11@6575.86,3834.14 ; TL084.11@6590,3820 6530,3820 6505,3795 ; C8.1@6665.86,4979.14 ccw(c6631.72,5013.28) 6680,5013.28 ccw(c6728.28,5013.28) C8.1@6694.14,4979.14 ; CD4051.7@6665.86,5165.86 cw(c6631.72,5131.72) 6680,5131.72 cw(c6728.28,5131.72) CD4051.7@6694.14,5165.86 ; CD4051.7@6665.86,5194.14 ccw(c6631.72,5228.28) 6680,5228.28 ccw(c6728.28,5228.28) CD4051.7@6694.14,5194.14 ; C8.1@6680,4960 CD4051.7@6680,5180 6680,5270 6760,5350 7180,5350 ; R3.3@7169.39,5729.39 cw(c7143.79,5703.79) 7180,5703.79 cw(c7216.21,5703.79) R3.3@7190.61,5729.39 ; R3.3@7180,5740 7180,5350 ; 7905.3@7220,2600 C17.2@7500,2600 C18.1@7800,2600 7985,2600 8105,2720 8105,2900 8045,2960 7980,2960 ; 7905.3@7235.91,2584.09 cw(c7274.32,2545.68) 7274.32,2600 cw(c7274.32,2654.32) 7905.3@7235.91,2615.91 ; C17.2@7480.86,2585.86 ccw(c7446.72,2551.72) 7446.72,2600 ccw(c7446.72,2648.28) C17.2@7480.86,2614.14 ; C17.2@7519.14,2585.86 cw(c7553.28,2551.72) 7553.28,2600 cw(c7553.28,2648.28) C17.2@7519.14,2614.14 ; -5V.1@7550,2960 -5V.2@7650,2960 7760,2960 ; -5V.1@7560.61,2949.39 cw(c7586.21,2923.79) 7586.21,2960 cw(c7586.21,2996.21) -5V.1@7560.61,2970.61 ; -5V.2@7639.39,2949.39 ccw(c7613.79,2923.79) 7613.79,2960 ccw(c7613.79,2996.21) -5V.2@7639.39,2970.61 ; -5V.2@7660.61,2949.39 cw(c7686.21,2923.79) 7686.21,2960 cw(c7686.21,2996.21) -5V.2@7660.61,2970.61 ; C7.1@7665.86,5019.14 ccw(c7631.72,5053.28) 7680,5053.28 ccw(c7728.28,5053.28) C7.1@7694.14,5019.14 ; OP07.4@7665.86,5200.86 cw(c7631.72,5166.72) 7680,5166.72 cw(c7728.28,5166.72) OP07.4@7694.14,5200.86 ; OP07.4@7665.86,5205.86 ccw(c7631.72,5171.72) 7631.72,5220 ccw(c7631.72,5268.28) OP07.4@7665.86,5234.14 ; C7.1@7680,5000 OP07.4@7680,5220 7310,5220 7180,5350 ; pad.3@7745.86,3035.86 cw(c7711.72,3001.72) 7760,3001.72 cw(c7808.28,3001.72) pad.3@7774.14,3035.86 ; pad.4@7745.86,3205.86 ccw(c7711.72,3171.72) 7711.72,3220 ccw(c7711.72,3268.28) pad.4@7745.86,3234.14 ; pad.3@7760,3050 7760,2960 ; pad.4@7760,3220 6680,3220 6505,3395 6505,3795 ; C18.1@7780.86,2585.86 ccw(c7746.72,2551.72) 7746.72,2600 ccw(c7746.72,2648.28) C18.1@7780.86,2614.14 ; C18.1@7819.14,2585.86 cw(c7853.28,2551.72) 7853.28,2600 cw(c7853.28,2648.28) C18.1@7819.14,2614.14 ; C14.1@7965.86,3025.86 cw(c7931.72,2991.72) 7980,2991.72 cw(c8028.28,2991.72) C14.1@7994.14,3025.86 ; C14.1@7980,3040 7980,2960 ; 7760,2960 7980,2960
-VCC: 7905.2 34063.4 -VCC.1 -VCC.2 C16.1 C19.1 C20.2 C27.2 D3.1 R27.1 | length 6045.8
  Bottom Layer w30: 34063.4@6105.86,3059.14 ccw(c6047.57,3117.43) 6130,3117.43 ; R27.1@6115.86,3240.86 cw(c6081.72,3206.72) 6130,3206.72 cw(c6178.28,3206.72) R27.1@6144.14,3240.86 ; R27.1@6130,3260 6130,3050 34063.4@6120,3040 6360,3040 C19.1@6380,3060 6530,3060 ; 34063.4@6134.14,3025.86 cw(c6168.28,2991.72) 6168.28,3040 cw(c6168.28,3088.28) 34063.4@6134.14,3054.14 ; 6278.43,3040 ccw(c6278.43,3156.57) C19.1@6360.86,3074.14 ; C19.1@6399.14,3045.86 cw(c6433.28,3011.72) 6433.28,3060 cw(c6433.28,3108.28) C19.1@6399.14,3074.14 ; C27.2@6460,2360 6530,2430 D3.1@6530,2740 6530,3060 ; C27.2@6460,2385 ccw(c6460,2445.36) 6502.68,2402.68 ; C27.2@6480,2365 cw(c6516.21,2365) C27.2@6490.61,2390.61 ; D3.1@6515.86,2720.86 cw(c6481.72,2686.72) 6530,2686.72 cw(c6578.28,2686.72) D3.1@6544.14,2720.86 ; D3.1@6515.86,2759.14 ccw(c6481.72,2793.28) 6530,2793.28 ccw(c6578.28,2793.28) D3.1@6544.14,2759.14 ; 6654.64,3060 cw(c6654.64,2989.64) -VCC.2@6704.39,3039.39 ; -VCC.1@6709.39,2960.61 ccw(c6683.79,2986.21) 6720,2986.21 ccw(c6756.21,2986.21) -VCC.1@6730.61,2960.61 ; -VCC.2@6709.39,3039.39 cw(c6683.79,3013.79) 6720,3013.79 cw(c6756.21,3013.79) -VCC.2@6730.61,3039.39 ; -VCC.1@6720,2950 -VCC.2@6720,3050 ; -VCC.2@6735.61,3060.61 ccw(c6785.36,3110.36) 6785.36,3040 ; C16.1@6960.86,3025.86 ccw(c6926.72,2991.72) 6926.72,3040 ccw(c6926.72,3088.28) C16.1@6960.86,3054.14 ; C16.1@6999.14,3025.86 cw(c7033.28,2991.72) 7033.28,3040 cw(c7033.28,3088.28) C16.1@6999.14,3054.14 ; 7905.2@7104.09,2576.59 cw(c7065.68,2538.18) 7120,2538.18 cw(c7174.32,2538.18) 7905.2@7135.91,2576.59 ; 7905.2@7120,2600 7120,2535 7190,2465 7985,2465 8185,2665 8185,3025 8075,3135 7495,3135 7400,3040 C20.2@7280,3040 C16.1@6980,3040 6730,3040 -VCC.2@6720,3050 ; C20.2@7260.86,3025.86 ccw(c7226.72,2991.72) 7226.72,3040 ccw(c7226.72,3088.28) C20.2@7260.86,3054.14 ; C20.2@7299.14,3025.86 cw(c7333.28,2991.72) 7333.28,3040 cw(c7333.28,3088.28) C20.2@7299.14,3054.14 ; 6530,3060 6710,3060 -VCC.2@6720,3050